# Altium PCB Main.PcbDoc
Units mil, origin at the board's own origin, x right, y up, seen from the top; angles counter-clockwise.
Board outline 1037 x 1530 mil, 2 copper layers (Top Layer, Bottom Layer); 27 components, 49 nets, 158 pads, 38 vias.
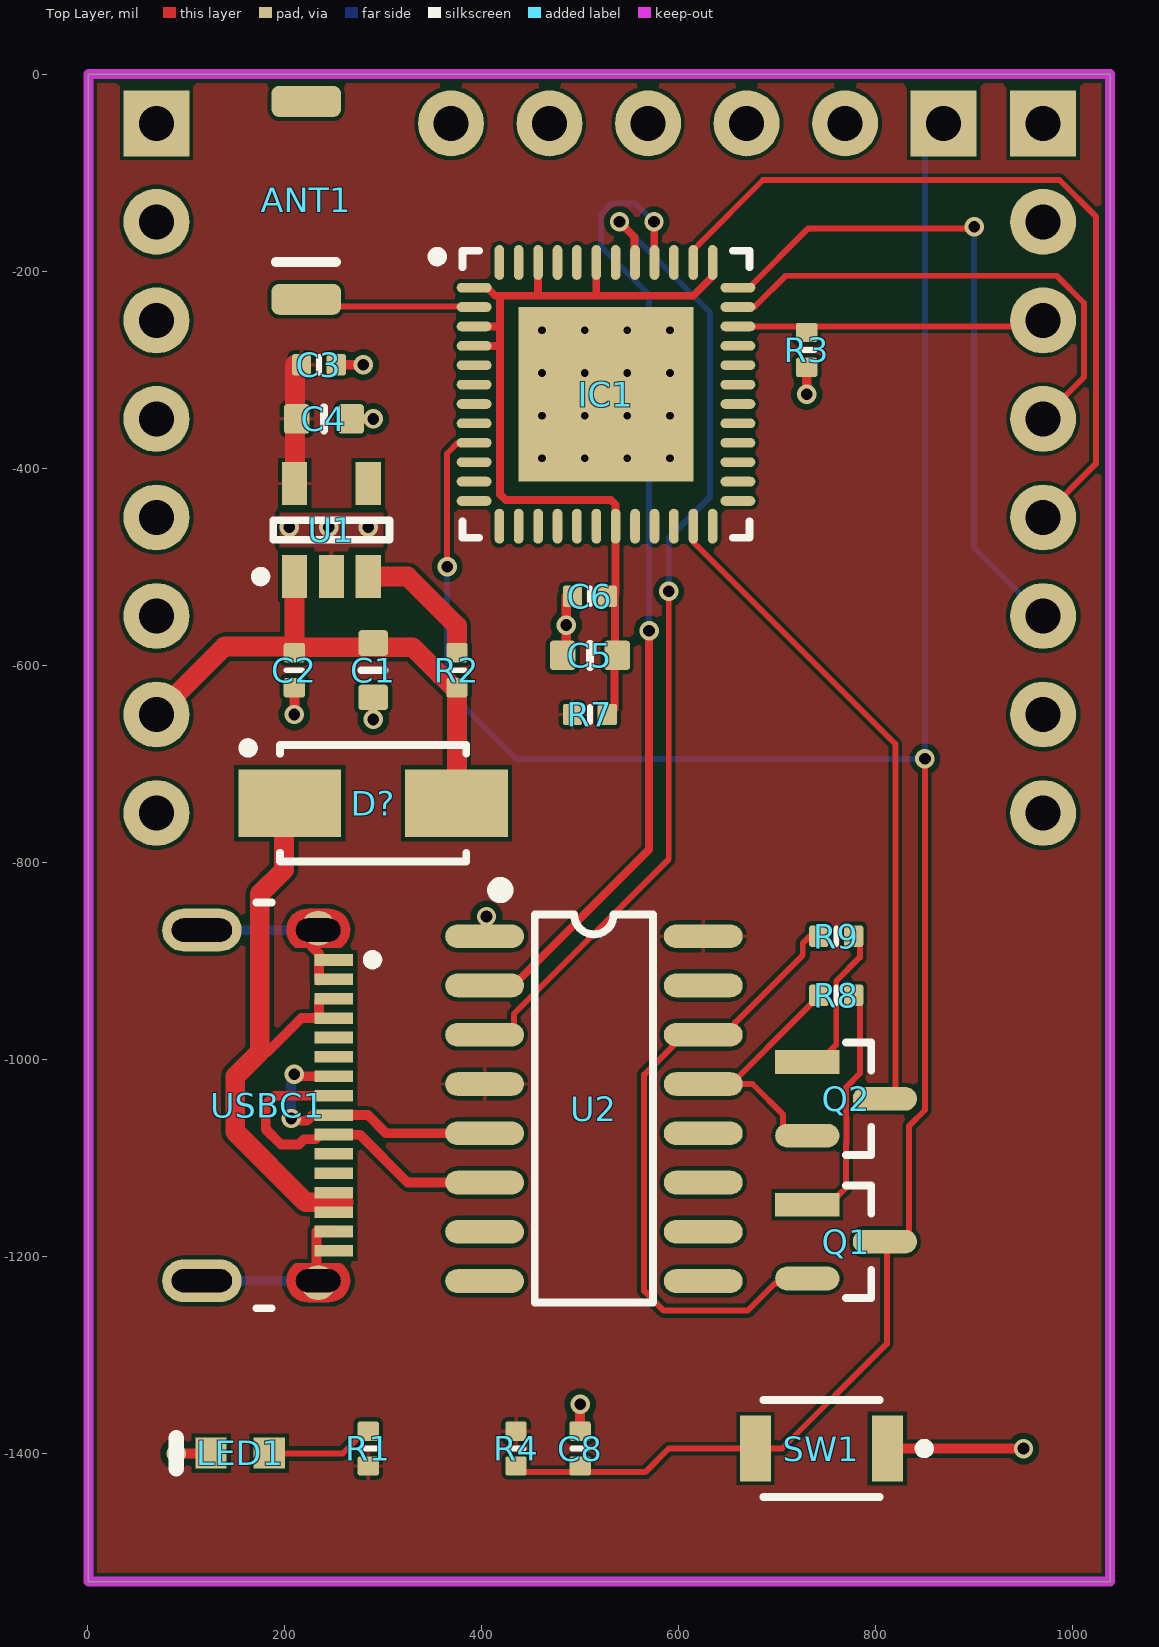
[diagram p0: Top Layer view]
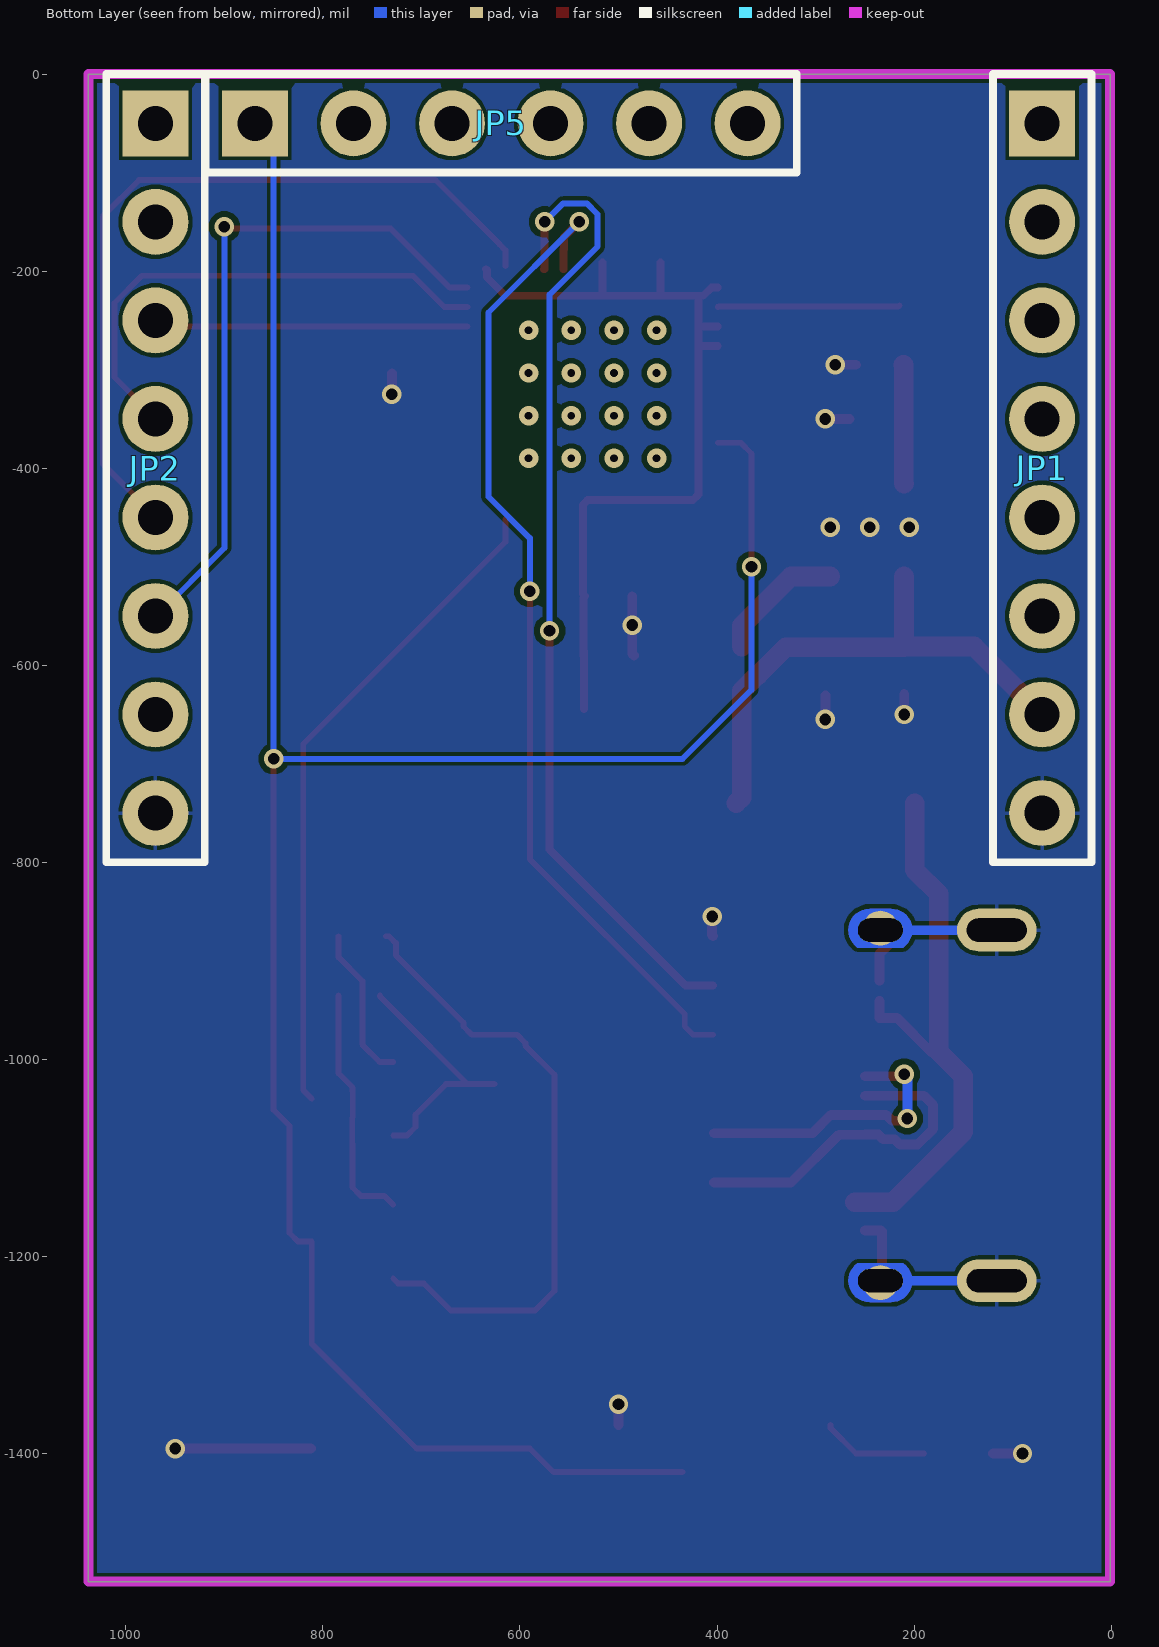
[diagram p1: Bottom Layer view, seen from below]

## Layer stack, top to bottom
Top Solder: solder mask 0.4, Solder Resist, Dk 3.5
Top Layer: signal copper 1.4
Dielectric 1: dielectric 12.6, FR-4, Dk 4.8
Bottom Layer: signal copper 1.4
Bottom Solder: solder mask 0.4, Solder Resist, Dk 3.5

## Board outline
1,-1530 1,0 175,0 1038,0 1038,-1530

## Design rules (kind name [scope] priority, off if disabled: settings)
BoardOutlineClearance [All] p1: gap=7.87 ignorepadtopadclearanceinfootprint=FALSE
Clearance [All] p1: gap=4 ignorepadtopadclearanceinfootprint=FALSE except(5: Arc-Via Track-Via SMDPad-Via THPad-Via Via-Via Via-Fill Via-Poly Via-Region Via-Text; 9.84: Arc-Hole Track-Hole SMDPad-Hole THPad-Hole Via-Hole Fill-Hole Poly-Hole Region-Hole Text-Hole)
ComponentClearance [All] p1: gap=4 collisioncheckmode=3 verticalgap=4 showdistances=TRUE
DiffPairsRouting [All] p1: maxlimit=4 minlimit=4 mostfreqgap=4 toplayer_minwidth=4 toplayer_maxwidth=71497.94 toplayer_prefwidth=4 bottomlayer_minwidth=4 bottomlayer_maxwidth=71497.94 bottomlayer_prefwidth=4 maxuncoupledlength=500
Height [All] p1: minheight=0 maxheight=71497.94 prefheight=500
HoleSize [All] p1: absolutevalues=TRUE maxlimit=248.03 minlimit=7.87 maxpercent=80.000 minpercent=20.000
HoleToHoleClearance [All] p1: gap=9.84 allowstackedmicrovias=FALSE
MinimumAnnularRing [All] p1: minimumring=3
MinimumSolderMaskSliver [All] p1: minsoldermaskwidth=0
PlaneClearance [All] p1: clearance=4
PlaneConnect PlaneConnectPowerPads [InPadClass('PowerPads')] p1: planeconnectstyle=Direct reliefexpansion=20 reliefentries=4 reliefconductorwidth=10 reliefairgap=10
PlaneConnect [All] p2: pad.planeconnectstyle=Relief pad.reliefexpansion=11.81 pad.reliefentries=4 pad.reliefconductorwidth=4 pad.reliefairgap=4 via.planeconnectstyle=Direct via.reliefexpansion=11.81 via.reliefentries=4 via.reliefconductorwidth=5 via.reliefairgap=5
PolygonConnect PolygonConnectPowerPads [All vs (InPadClass('PowerPads'))] p1: connectstyle=Direct reliefconductorwidth=10 reliefentries=4 polygonreliefangle="90 Angle" airgapwidth=10
PolygonConnect [All] p2: thpad.connectstyle=Relief thpad.reliefconductorwidth=4 thpad.reliefentries=4 thpad.polygonreliefangle="90 Angle" thpad.airgapwidth=4 smdpad.connectstyle=Relief smdpad.reliefconductorwidth=4 smdpad.reliefentries=4 smdpad.polygonreliefangle="90 Angle" smdpad.airgapwidth=4 via.connectstyle=Direct via.reliefconductorwidth=5 via.reliefentries=4 via.polygonreliefangle="90 Angle" via.airgapwidth=5
RoomDefinition Main [InComponentClass('Main')] p1: confinementstyle=ConfineIn formatcopy=TRUE lockcomponents=FALSE outline -6094,-4130 -4094,-4130 -4094,-3130 -6094,-3130
RoutingVias [All] p1: holewidth=7.87 width=17.72 viastyle="Through Hole" minholewidth=7.87 minwidth=17.72 maxholewidth=248.03 maxwidth=257.87
SilkToSilkClearance [All] p1: silktosilkclearance=0
SilkToSolderMaskClearance [IsPad] p1: minsilkscreentomaskgap=4 clearancetoexposedcopper=TRUE
SolderMaskExpansion [All] p1: expansion=2.95 istentingtop=FALSE
Width [All] p1: maxlimit=71497.94 minlimit=4 preferedwidth=4
20 further rules are at their usual default settings.

## Classes and differential pairs
differential pair USB_D: +USB_D_P -USB_D_N

## Components (designator, comment, footprint, x,y, rotation, side; value= is the part's Value field where it differs from the comment)
ANT1 "2450AT43F0100E" 2450AT43F0100E-Footprint-1 222.14,-228.57 r0 top
C1 "Capacitor 10µF +/-20% 10V 0603" CAPC0603(1608)100_L 290,-605 r270 top value=10µF
C2 "Capacitor 100nF +/-20% 10V 0402" CAPC0402(1005)60_L 210,-605 r270 top value=100nF
C3 "Capacitor 100nF +/-20% 10V 0402" CAPC0402(1005)60_L 235,-295 r0 top value=100nF
C4 "Capacitor 10µF +/-20% 10V 0603" CAPC0603(1608)100_L 240,-350 r0 top value=10µF
C5 "Capacitor 10µF +/-20% 10V 0603" CAPC0603(1608)100_L 510,-590 r0 top value=10µF
C6 "Capacitor 100nF +/-20% 10V 0402" CAPC0402(1005)60_L 510,-530 r0 top value=100nF
C8 "Capacitor 100nF +/-20% 10V 0402" CAPC0402(1005)60_L 500,-1395 r270 top value=100nF
D? "SS14" DIOM4427X25N 290,-740 r0 top
IC1 "ESP32-PICO-D4" QFN50P700X700X104_HS-49N 526.29,-325 r0 top
JP1 "1-87220-8" 1-87220-8-Footprint-1 70,-50 r180 bottom
JP2 "1-87220-8" 1-87220-8-Footprint-1 970,-50 r180 bottom
JP5 "HDR-1X6" HDR2.54-LI-6P 619,-50 r180 bottom
LED1 "19-217/BHC-ZL1M2RY/3T" EVRL-0603-2_V 155,-1399.74 r180 top
Q1 "SS8050-G" FP-SS8050-G-IPC_A 770,-1185 r0 top
Q2 "SS8050-G" FP-SS8050-G-IPC_A 770,-1040 r0 top
R1 "Resistor 330R +/-5 % 0402 63 mW" RESC0402(1005)_L 285,-1395 r270 top value=330
R2 "100KR2F" RESC0402(1005)_L 375,-605 r90 top value=100k
R3 "100KR2F" RESC0402(1005)_L 730,-280 r90 top value=100k
R4 "100KR2F" RESC0402(1005)_L 435,-1395 r90 top value=100k
R7 "Resistor 330R +/-5 % 0402 63 mW" RESC0402(1005)_L 510,-650 r0 top value=330
R8 "10KR2F" RESC0402(1005)_L 760,-935 r180 top value=10k
R9 "10KR2F" RESC0402(1005)_L 760,-875 r180 top value=10k
SW1 "B3U-1000P" OMRON-B3U-1000_V 745,-1395 r180 top
U1 "LDS3985M18R" SOT23-5L_N 247.6,-462.76 r90 top
U2 "DEV-17725" DEV-17725-Footprint-1 404.05,-875 r0 top
USBC1 "213083-0005" FP-213083-0005-MFG 110.24,-1046.73 r270 top

## Footprints (in the part's own frame and the unit in brackets; to place one, negate y for a bottom-side part, rotate by r counter-clockwise, add the part's x,y. Pads: shape width x height; smd on the part's side, far side on the other; paste and mask are expansions set on the pad)
1-87220-8-Footprint-1 [mm]
  rect 1.7x1.7 hole 0.9: 1(0,0)
  round 1.7 hole 0.9: 2(0,-2.54) 3(0,-5.08) 4(0,-7.62) 5(0,-10.16) 6(0,-12.7) 7(0,-15.24) 8(0,-17.78)
  silkscreen extent -1.27,-19.05 1.27,1.27, body extent -1.27,-19.05 1.27,1.27, height 2.54
2450AT43F0100E-Footprint-1 [mm]
  rrect50% 1.8x0.8 smd: 1(0,0) ""(0,5.103)
  silkscreen extent -0.79,0.97 0.76,0.97, body extent -0.94,-0.03 0.91,5.08, height 1.32
CAPC0402(1005)60_L [mm] "Chip Capacitor, Body 1.0x0.5mm, Height 0.6mm, IPC High Density"
  rrect25% 0.5x0.55 smd: 1(-0.45,0) 2(0.45,0)
  silkscreen extent 0,-0.2 0,0.2, body extent -0.5,-0.25 0.5,0.25, height 0.6
CAPC0603(1608)100_L [mm] "Chip Capacitor, Body 1.6x0.8mm, Height 1.0mm, IPC High Density"
  rrect25% 0.66x0.76 smd: 1(-0.7,0) 2(0.7,0)
  silkscreen extent 0,-0.3 0,0.3, body extent -0.8,-0.4 0.8,0.4, height 0.95
DEV-17725-Footprint-1 [mil]
  oval 80x24 smd: 1(-0.95,0) 2(-0.95,-50) 3(-0.95,-100) 4(-0.95,-150) 5(-0.95,-200) 6(-0.95,-250) 7(-0.95,-300) 8(-0.95,-350) 9(220.95,-350) 10(220.95,-300) 11(220.95,-250) 12(220.95,-200) 13(220.95,-150) 14(220.95,-100) 15(220.95,-50) 16(220.95,0)
  silkscreen extent 11,-372 170,51, body extent -8,-372 228,22, height 75
DIOM4427X25N [mm] "Molded Diode, 2-Leads, Body 4.38x2.73mm, IPC Medium Density"
  rect 2.65x1.75 smd: 1(-2.15,0) 2(2.15,0)
  silkscreen extent -3.35,-1.5 2.4,1.55, body extent -2.38,-1.48 2.37,1.47, height 2.5
EVRL-0603-2_V [mm] "SMD, 2-Leads, Body 1.6x0.8mm"
  rect 0.8x0.8 smd: 1(-0.75,0) 2(0.75,0)
  silkscreen extent 1.65,-0.4 1.65,0.4, body extent -0.8,-0.4 0.8,0.4, height 0.5
FP-213083-0005-MFG [mm]
  round 0.9 smd paste-1000 mask+0: 1(-4.57,3.15) 2(4.57,3.15)
  round 0.9 smd far side paste-1000 mask+0: 1(-4.57,3.15) 2(4.57,3.15)
  rrect100% 0.6x1.15 hole 1.15 slot 0.6 at 0 deg paste-1000 mask+0: 1(-4.52,3.15) 2(4.52,3.15)
  rrect100% 1.1x2.05 hole 1.55 slot 0.6 at 0 deg paste-1000 mask+0: 3(-4.52,0.15) 4(4.52,0.15)
  rect 0.3x1 smd paste+0 mask+0: A1(-3.75,3.55) A4(-2.75,3.55) A5(-1.75,3.55) A6(-0.75,3.55) A7(0.75,3.55) A8(1.75,3.55) A9(2.75,3.55) A12(3.75,3.55) B1(3.25,3.55) B4(2.25,3.55) B5(1.25,3.55) B6(0.25,3.55) B7(-0.25,3.55) B8(-1.25,3.55) B9(-2.25,3.55) B12(-3.25,3.55)
  Top Layer region: -4.52,3.975 -4.266,3.913 -4.07,3.74 -4.07,3.74 -4.07,2.56 -4.266,2.387 -4.52,2.325 -4.52,2.325 -4.73,2.367 -4.909,2.486 -5.028,2.665 -5.07,2.875 -5.07,2.875 -5.07,3.425 -4.996,3.7 -4.795,3.901 -4.52,3.975 -4.52,3.975
  Top Layer region: 4.52,3.975 4.266,3.913 4.07,3.74 4.07,3.74 4.07,2.56 4.266,2.387 4.52,2.325 4.52,2.325 4.73,2.367 4.909,2.486 5.028,2.665 5.07,2.875 5.07,2.875 5.07,3.425 4.996,3.7 4.795,3.901 4.52,3.975
  Bottom Layer region: -4.52,3.975 -4.266,3.913 -4.07,3.74 -4.07,3.74 -4.07,2.56 -4.266,2.387 -4.52,2.325 -4.52,2.325 -4.73,2.367 -4.909,2.486 -5.028,2.665 -5.07,2.875 -5.07,2.875 -5.07,3.425 -4.996,3.7 -4.795,3.901 -4.52,3.975 -4.52,3.975
  Bottom Layer region: 4.52,3.975 4.266,3.913 4.07,3.74 4.07,3.74 4.07,2.56 4.266,2.387 4.52,2.325 4.52,2.325 4.73,2.367 4.909,2.486 5.028,2.665 5.07,2.875 5.07,2.875 5.07,3.425 4.996,3.7 4.795,3.901 4.52,3.975
  silkscreen extent -5.23,1.55 5.23,4.68
FP-SS8050-G-IPC_A [mm]
  rect 1.657x0.612 smd paste+0 mask+0: 1(-1.001,0.95)
  rrect100% 1.657x0.612 smd paste+0 mask+0: 2(-1.001,-0.95) 3(1.001,0)
  silkscreen extent 0,-1.45 0.65,1.45, body extent -2.33,-1.95 2.33,1.95, height 0.25
HDR2.54-LI-6P [mm] "ÅÅÕë£¬6½Å                        ÁªÏµÂô¼Ò Ãâ·Ñ²éÕÒ·â×°"
  rect 1.7x1.7 hole 0.9: 1(-6.35,0)
  round 1.7 hole 0.9: 2(-3.81,0) 3(-1.27,0) 4(1.27,0) 5(3.81,0) 6(6.35,0)
  silkscreen extent -7.62,-1.27 7.62,1.27, body extent -7.62,-1.27 7.62,1.27, height 2.54
OMRON-B3U-1000_V [mm] "SMD, 2-Leads, Body 3x2.5mm"
  rect 0.8x1.7 smd: 1(-1.7,0) 2(1.7,0)
  silkscreen extent -2.78,-1.25 1.5,1.25, body extent -1.5,-1.25 1.5,1.25, height 1.75
QFN50P700X700X104_HS-49N [mm] "QFN, 48-Leads, Body 7.00x7.00mm, Pitch 0.50mm, Thermal Pad 4.50x4.50mm, IPC Medium Density"
  oval 0.9x0.25 smd: 1(-3.4,2.75) 2(-3.4,2.25) 3(-3.4,1.75) 4(-3.4,1.25) 5(-3.4,0.75) 6(-3.4,0.25) 7(-3.4,-0.25) 8(-3.4,-0.75) 9(-3.4,-1.25) 10(-3.4,-1.75) 11(-3.4,-2.25) 12(-3.4,-2.75) 25(3.4,-2.75) 26(3.4,-2.25) 27(3.4,-1.75) 28(3.4,-1.25) 29(3.4,-0.75) 30(3.4,-0.25) 31(3.4,0.25) 32(3.4,0.75) 33(3.4,1.25) 34(3.4,1.75) 35(3.4,2.25) 36(3.4,2.75)
  oval 0.25x0.9 smd: 13(-2.75,-3.4) 14(-2.25,-3.4) 15(-1.75,-3.4) 16(-1.25,-3.4) 17(-0.75,-3.4) 18(-0.25,-3.4) 19(0.25,-3.4) 20(0.75,-3.4) 21(1.25,-3.4) 22(1.75,-3.4) 23(2.25,-3.4) 24(2.75,-3.4) 37(2.75,3.4) 38(2.25,3.4) 39(1.75,3.4) 40(1.25,3.4) 41(0.75,3.4) 42(0.25,3.4) 43(-0.25,3.4) 44(-0.75,3.4) 45(-1.25,3.4) 46(-1.75,3.4) 47(-2.25,3.4) 48(-2.75,3.4)
  rect 4.5x4.5 smd: 49(0,0)
  silkscreen extent -4.47,-3.7 3.7,3.7, body extent -3.55,-3.55 3.55,3.55, height 1.04
RESC0402(1005)_L [mm] "Chip Resistor, Body 1.0x0.5mm, IPC High Density"
  rrect25% 0.5x0.55 smd: 1(-0.45,0) 2(0.45,0)
  silkscreen extent 0,-0.2 0,0.2, body extent -0.5,-0.25 0.5,0.25, height 0.3
SOT23-5L_N [mm] "SOT23, 5-Leads, Body 2.9x1.6mm, Pitch 0.95mm, Lead Span 2.8mm, IPC Medium Density"
  rect 1.1x0.65 smd: 1(-1.2,0.95) 2(-1.2,0) 3(-1.2,-0.95) 4(1.2,-0.95) 5(1.2,0.95)
  silkscreen extent -1.32,-1.5 0.25,1.95, body extent -0.87,-1.5 0.87,1.5, height 1.45

## Part data
ANT1: library part CMP-00025-00003-1, "Antenna Chip 1dBi Gain 2500MHz 2-Pin T/R"
C1 C4 C5: library part CMP-001-00075-4, "Chip Capacitor, 10µF +/-20%, 10V, 0603, Thickness 1 mm", Case/Package=0603, Max Operating Temperature=85°C, Min Operating Temperature=-55°C, Tolerance=10%, Voltage Rating=10V, Mounting Technology=SMT, Pins=2
C2 C3 C6 C8: library part CMP-001-00061-3, "Chip Capacitor, 100nF +/-20%, 10V, 0402, Thickness 0.6 mm", Case/Package=0402, Max Operating Temperature=85°C, Min Operating Temperature=-55°C, Tolerance=20%, Voltage Rating=10V, Mounting Technology=SMT, Pins=2
D?: library part CMP-004-00031-1, "Schottky Diodes & Rectifiers SMA 40V 1.0A", ComponentLink1Description="Mouser Link", ComponentLink1URL=https://www.mouser.com/ProductDetail/onsemi-Fairchild/SS14?qs=mVVXn4M53U%252BvrBaFv5vr4w%3D%3D
IC1: library part CMP-021-00007-1, "RF System on a Chip - SoC SIP module ESP32 with 4MByte Flash, Dual Core MCU, Wi-Fi & Bluetooth Combo, LGA48-pin, 7*7mm"
JP1 JP2: library part CMP-002-00072-1, "Conn Unshrouded Header HDR 1x8 POS 2.54mm Solder ST Thru-Hole Carton"
JP5: library part "Header 6", "6P接插件", BOM名称=6P接插件, 封装库来自淘宝卖家ID:黄晶宝石=其他店铺购入均为盗版假冒封装库，请立即申请退款，本店现金奖励20~200元, 联系卖家，免费查找封装=唯一出售店铺网址https://shop463601444.taobao.com
LED1: library part CMP-007-00003-2, "Chip LED, Blue, 5 V, 25 mA, -40 to 85 degC, 2-Pin SMD (0603), RoHS, Tape and Reel", Case/Package=0603, Colour=Blue, Forward Current=25mA, Forward Voltage=3V, Manufacturer="Everlight Electronics", Max Operating Temperature=85°C, Min Operating Temperature=-40°C, Package Description="2-Pin Surface Mount Device, Body 1.6 x 0.8 mm", Datasheet URL=https://datasheet.ciiva.com/26901/getdatasheetpartid-420616-26901324.pdf, Datasheet Version="Rev. 1.0, 03/2003", Lens Style=Diffused, Luminous Intensity=28.5mcd, Manufacturer URL=http://www.everlight.com/, Mounting Technology=SM, Package Reference=0603, Packaging=TapeandReel, Pins=2, RoHS Compliant=True, Viewing Angle=120degrees
Q1 Q2: library part CMP-013-00034-1, "Bipolar Transistors - BJT NPN TRANSISTOR 1.5A 40V", Case/Package=TO-236-3, Collector Emitter Breakdown Voltage=25V, Collector-emitter Voltage-Max=400mV, Max Collector Current=1.5A, Max Power Dissipation=300mW, Max Breakdown Voltage=25V, Mounting Technology="Surface Mount", Series=-
R1 R7: library part CMP-009-00132-3, "Chip Resistor, 330 Ohms, +/-5 %, 63 mW, -55 to 155 degC, 0402", Case/Package=0402, Max Operating Temperature=155°C, Min Operating Temperature=-55°C, Power=63mW, Tolerance=5%, Pins=2
R2 R3 R4: library part CMP-009-00064-2, "100K 0.063W 1% 0402 (1005 Metric)  SMD", Case/Package=0402, Power=63mW, Tolerance=1%, Mounting Technology=SMT, Pins=2
R8 R9: library part CMP-009-00066-2, "10K 0.063W 1% 0402 (1005 Metric)  SMD", Case/Package=0402, Power=63mW, Tolerance=1%, Mounting Technology=SMT, Pins=2
SW1: library part CMP-011-00000-2, "Tactile Switch, SPST-NO, 0.05 A, 12 V, -25 to 70 degC, 2-Pin SMD, RoHS, Tape and Reel", Case/Package=B3U-1000, Contact Current Rating=50mA, IP Rating=IP40, Manufacturer="Omron Electronic Components", Max Contact Resistance=100mohm, Max Operating Temperature=70°C, Max Voltage Rating (DC)=12V, Min Operating Temperature=-25°C, Operating Force=153gf, Package Description="2-Pin Surface Mount Device, Body 3 x 2.5 mm", Package Quantity=3500, Resistance=0.1Ohm, Contact Material=Silver, Current Rating=50mA, Datasheet URL=http://www.omron.com/ecb/products/pdf/en-b3u.pdf, Datasheet Version=Jan-15, Manufacturer URL=http://www.omron.com/, Max Current Rating=50mA, Mounting Technology=SM, Package Reference=B3U-1000, Packaging=TapeandReel, RoHS Compliant=True, Throw Configuration=SPST, Voltage Rating=12V, Voltage Rating (DC)=12V
U1: library part CMP-019-00049-1, "LDS3985 Series 1.8 V 300 mA Fixed Surface Mount Voltage Regulator - SOT-23-5", Case/Package=SOT-23, Input Bias Current=85uA, Max Operating Temperature=125°C, Max Output current=300mA, Max Supply Current=300uA, Max Supply Voltage=6V, Min Input Voltage=2.5V, Min Operating Temperature=-40°C, Min Output Voltage=1.8V, Package Quantity=3000, Power Supply Rejection Ratio (PSRR)=50dB, Quiescent Current=150uA, Lead Free="Lead Free", Mounting Technology="Surface Mount", Number of Outputs=1, Number of Regulators=1, Output Configuration=Positive, Output Current=300mA, Output Type=Fixed, Output Voltage=1.8V, Packaging="Tape and Reel", Pins=5, Polarity=Positive, Radiation Hardening=No, RoHS Compliant=Yes, Series=-
U2: library part CMP-015-00008-3, "Sparkfun Micromod Update Tool CH340C"
USBC1: library part CMP-002-00073-2, "Connector USB Type C Receptacle 16 Position 0.5mm Surface Mount Right Angle Emboss T/R"

## Via types
v1: diameter 19.68, hole 11.81, Top Layer to Bottom Layer, 22 vias
v2: diameter 19.68, hole 7.87, Top Layer to Bottom Layer, 16 vias

## Nets (pads, with @x,y where several pads share a name; then routed paths per layer and width w, separated by ;. In a path a pad name is that pad's centre, name@x,y a point inside that pad or via, vN(x,y) a via of type N, cw(c..) or ccw(c..) an arc to the next point about the centre after c; other vN are vias at no path point)
3V3: C3.1 C4.1 R1.2 R4.2 R7.1 U1.5 U2.4 U2.16 | length 121.1
  Top Layer w20: U1.5 210.6,-415.11 210.6,-295 C3.1@211,-295
A3V3: C5.2 C6.2 IC1.1 IC1.3 IC1.4 IC1.19 IC1.37 IC1.43 IC1.46 R7.2 | length 899.4
  Top Layer w8: IC1.4@399.32,-275.79 418.06,-275.79 418.85,-275 ; IC1.3@399.32,-256.1 417.74,-256.1 418.85,-255 ; IC1.1@399.32,-216.73 405.72,-216.73 413.99,-225 418.85,-225 ; IC1.46 457.39,-222.39 460,-225 ; IC1.43 516.44,-223.56 515,-225 ; R7.2@535,-644.21 C5.2@535,-585.79 ; C5.2@535.59,-590 535.59,-531.59 534,-530 536.13,-527.87 536.13,-437.13 531.44,-432.44 424.7,-432.44 418.85,-426.58 418.85,-275 ; IC1.37@634.56,-198.03 633.63,-198.95 633.63,-206.2 614.84,-225 515,-225 ; 418.85,-275 418.85,-255 ; 418.85,-255 418.85,-225 ; 418.85,-225 460,-225 ; 460,-225 515,-225
CH_RX: IC1.41 U2.3 | length 1024
  Top Layer w6: U2.3@404.05,-975 424.43,-975 432.75,-966.69 432.75,-954 590,-796.75 v1(590,-525)
  Top Layer w8: v1(540,-150) 540,-150.07 555.41,-165.48 555.41,-177.44 555.81,-177.85 IC1.41@555.81,-198.03
  Bottom Layer w6: v1(540,-150) 632,-242 632,-429 590,-471 v1(590,-525)
CH_TX: IC1.40 U2.2 | length 1002.4
  Top Layer w8: U2.2@404.05,-925 432.05,-925 570,-787.05 v1(570,-565) ; v1(575,-150) 575.25,-150.25 575.25,-197.78 IC1.40@575.5,-198.03
  Bottom Layer w6: v1(570,-565) 570,-223.84 521.25,-175.09 521.25,-142.23 532.23,-131.25 556.25,-131.25 v1(575,-150)
DTR: Q2.2 R8.2 U2.13 | length 258.6
  Top Layer w6: U2.13@625.95,-1025 U2.13@653.3,-1025 ; 726,-952.3 U2.13@653.3,-1025 ; 726,-952.27 742.28,-935.98 R8.2 ; Q2.2@728.66,-1077.4 714.88,-1077.4 706.07,-1068.59 706.07,-1056.12 674.95,-1025 U2.13@653.3,-1025
EN: C8.2 IC1.9 JP5.1 Q1.3 R4.1 SW1.2 | length 2493.7
  Top Layer w6: v1(365,-500) 365,-385 375.79,-374.21 IC1.9@399.32,-374.21 ; R4.1@435,-1419 566,-1419 590,-1395 705,-1395 811.34,-1288.66 811.34,-1185 825.12,-1185 833.93,-1176.19 833.93,-1067.54 850,-1051.47 v1(850,-695)
  Bottom Layer w6: v1(365,-500) 365,-625 435,-695 v1(850,-695) 850,-69 JP5.1
FLASH_CLK: 
FLASH_CS: 
FLASH_SD0: 
FLASH_SD1: 
FLASH_SD2: 
FLASH_SD3: 
GND: C1.2 C2.2 C3.2 C4.2 C5.1 C6.1 C8.1 JP1.8 JP2.8 LED1.2 R3.1 SW1.1 U1.2 U2.1 USBC1.1 USBC1.2 USBC1.3 USBC1.4 USBC1.A1 USBC1.A12 USBC1.B1 USBC1.B12 | length 748.7
  Top Layer w10: v1(90,-1400) LED1.2@120,-1400 ; v1(210,-650) C2.2@210,-629 ; USBC1.2@218.66,-1230.75 232.52,-1216.89 232.52,-1174.57 233.43,-1173.66 USBC1.B1@250.16,-1173.66 ; USBC1.1@218.66,-876.42 235,-892.75 USBC1.B12@235,-920.28 ; C3.2@259,-295 v1(280,-295) ; C4.2@265.59,-350 v1(290,-350) ; v1(290,-655) C1.2@290,-630.59 ; U2.1@404.05,-875 405,-874.05 v1(405,-855) ; C5.1@484.41,-590 486,-588.41 C6.1@486,-530 ; C8.1@500,-1371 v1(500,-1350) ; v1(730,-325) R3.1@730,-304 ; SW1.1 v1(950,-1395)
  Bottom Layer w10: USBC1.4 USBC1.2@234.25,-1224.69 ; USBC1.3@121.94,-869 USBC1.1@240.06,-869
  other v1: 486,-559.2 205,-460 245,-460 285,-460
GPIO0: IC1.23 Q2.3 | length 676.6
  Top Layer w6: IC1.23@614.87,-451.97 614.87,-474.87 820,-680 820,-1031.34 Q2.3@811.34,-1040
GPIO2: 
GPIO4: 
GPIO5/SPI1_SS: IC1.34 JP2.3 R3.2 | length 318.3
  Top Layer w6: IC1.34@653.26,-256.1 962.9,-256.1 JP2.3@969,-250
GPIO9: 
GPIO10: 
GPIO12: 
GPIO13: 
GPIO14: 
GPIO15: 
GPIO18/SPI1_SCK: IC1.35 JP2.4 | length 518
  Top Layer w6: IC1.35@653.26,-236.42 676.88,-236.42 708.6,-204.71 983.76,-204.71 1011.46,-232.41 1011.46,-307.54 JP2.4@969,-350
GPIO19/SPI1_MISO: IC1.38 JP2.5 | length 798.1
  Top Layer w6: IC1.38@614.87,-195.08 614.87,-178.67 620.63,-172.91 620.63,-172.58 685.68,-107.54 986.59,-107.54 1023.46,-144.41 1023.46,-395.54 JP2.5@969,-450
GPIO21: 
GPIO22: 
GPIO23/SPI1_MOSI: IC1.36 JP2.6 | length 695.9
  Top Layer w6: IC1.36@653.26,-216.73 671.35,-216.73 731.16,-156.92 898.08,-156.92 v1(900,-155)
  Bottom Layer w6: v1(900,-155) 900,-481 JP2.6@969,-550
GPIO25: 
GPIO26: 
GPIO27: 
GPIO32: 
GPIO33: 
GPIO34: 
GPIO35: 
GPIO37: 
GPIO38: 
NetANT1_1: ANT1.1 IC1.2 | length 184.9
  Top Layer w6: ANT1.1@215,-235 215.71,-235.71 398.61,-235.71 IC1.2@399.32,-236.42
NetLED1_1: LED1.1 R1.1 | length 108.8
  Top Layer w6: LED1.1@190,-1400 259,-1400 285,-1374 R1.1@285,-1371
NetQ1_1: Q1.1 R8.1 | length 249.9
  Top Layer w6: Q1.1@728.66,-1147.6 737.71,-1138.55 761.58,-1138.55 770,-1130.13 770,-1085.52 770.23,-1085.29 770.23,-1058.93 769.77,-1058.47 769.77,-1032.11 770,-1031.88 770,-1028.38 784,-1014.38 R8.1@784,-935
NetQ2_1: Q2.1 R9.1 | length 158.6
  Top Layer w6: Q2.1@728.66,-1002.6 742.44,-1002.6 760,-985.04 760,-920.44 784,-896.44 R9.1@784,-875
NetR2_2: R2.2 U1.3 | length 131.7
  Top Layer w20: U1.3 325,-510 375,-560 R2.2@375,-581
RTS: Q1.2 R9.2 U2.14 | length 645.1
  Top Layer w6: Q1.2@728.66,-1222.4 723.65,-1227.41 697.59,-1227.41 670,-1255 585,-1255 565,-1235 565,-1015.57 594.5,-986.06 594.5,-983.31 602.82,-975 649.08,-975 657.39,-966.69 657.39,-962.78 726,-894.17 726,-882 733,-875 R9.2@736,-875
SENSOR_VN: 
SENSOR_VP: 
USB_D_N: U2.6 USBC1.A7 USBC1.B7 | length 350.8
  Top Layer w10: USBC1.B7 190.11,-1036.89 180.95,-1046.05 180.95,-1070.95 196.49,-1086.49 214.51,-1086.49 219.96,-1081.04 231.44,-1081.04 236.22,-1076.26 USBC1.A7 250.27,-1076.53 276.53,-1076.53 325,-1125 U2.6
USB_D_P: U2.5 USBC1.A6 USBC1.B6 | length 293
  Top Layer w4: v1@212.2,-1018.38 v1@212.2,-1017.2
  Top Layer w10: v1@204.66,-1062.34 222.55,-1062.34 228.31,-1056.57 USBC1.B6 284.66,-1056.57 303.09,-1075 U2.5 ; v1@212.2,-1017.2 USBC1.A6
  Bottom Layer w10: v1@206.69,-1060 206.69,-1020.16 208.15,-1018.7 v1@208.15,-1015
  other v1: 207,-1060 210,-1015
V_BUS: C1.1 C2.1 D?.2 JP1.7 R2.1 U1.1 | length 540
  Top Layer w20: JP1.7 139,-581 C2.1@210,-581 ; U1.1 210.2,-577.8 210,-578 C2.1@210,-581 ; D?.2@380.55,-740 375,-734.45 375,-629 375,-626 359,-610 358.37,-610 330,-581.63 210,-581.63 C2.1@210,-581
VUSB: D?.1 USBC1.A4 USBC1.A9 USBC1.B4 USBC1.B9 | length 585.6
  Top Layer w10: 174.84,-992.36 182.86,-992.36 217.07,-958.15 235,-958.15 USBC1.A4@235,-940.47
  Top Layer w20: D?.1@199.45,-740 199.45,-807.61 174.84,-832.21 174.84,-992.36 150,-1017.2 150,-1073.49 221.51,-1145 250,-1145 260,-1145
pads on no net: ANT1. IC1.5 IC1.6 IC1.7 IC1.8 IC1.10 IC1.11 IC1.12 IC1.13 IC1.14 IC1.15 IC1.16 IC1.17 IC1.18 IC1.20 IC1.21 IC1.22 IC1.24 IC1.25 IC1.26 IC1.27 IC1.28 IC1.29 IC1.30 IC1.31 IC1.32 IC1.33 IC1.39 IC1.42 IC1.44 IC1.45 IC1.47 IC1.48 IC1.49 JP1.1 JP1.2 JP1.3 JP1.4 JP1.5 JP1.6 JP2.1 JP2.2 JP2.7 JP5.2 JP5.3 JP5.4 JP5.5 JP5.6 U1.4 U2.7 U2.8 U2.9 U2.10 U2.11 U2.12 U2.15 USBC1.A5 USBC1.A8 USBC1.B5 USBC1.B8
copper on no net:
  other v2: 461.33,-389.96 504.63,-389.96 547.94,-389.96 591.25,-389.96 461.33,-346.65 504.63,-346.65 547.94,-346.65 591.25,-346.65 461.33,-303.35 504.63,-303.35 547.94,-303.35 591.25,-303.35 461.33,-260.04 504.63,-260.04 547.94,-260.04 591.25,-260.04

## Polygon pours and split planes (outlines as drawn)
3V3 on Top Layer "VC" (solid, remove dead copper, pour order 2): -80,65 1130,65 1130,-1570 -85.17,-1570
GND on Top Layer "VC" (solid, pour order 0): 195,-445 300,-445 300,-480 265,-480 265,-530 230,-530 230,-480 195,-480
GND on Bottom Layer "VC" (solid, remove dead copper, pour order 4): -70,70 1160,70 1160,-1705 -75,-1705

## Keep-outs
Keep-Out Layer:
  the board outline again, w10

## Silkscreen, mask and mechanical layers (free items; w line width, h text height)
Mechanical 1:
  the board outline again, w10